# Altium PCB 分电板V2.PcbDoc (part 2 of 2)
Units mil, origin at the board's own origin, x right, y up, seen from the top; angles counter-clockwise.
Board outline 3149.61 x 2362.21 mil, 4 copper layers (Top Layer, GND, POWER, Bottom Layer), stack 23.756 mil thick; 196 components, 158 nets, 590 pads, 320 vias.
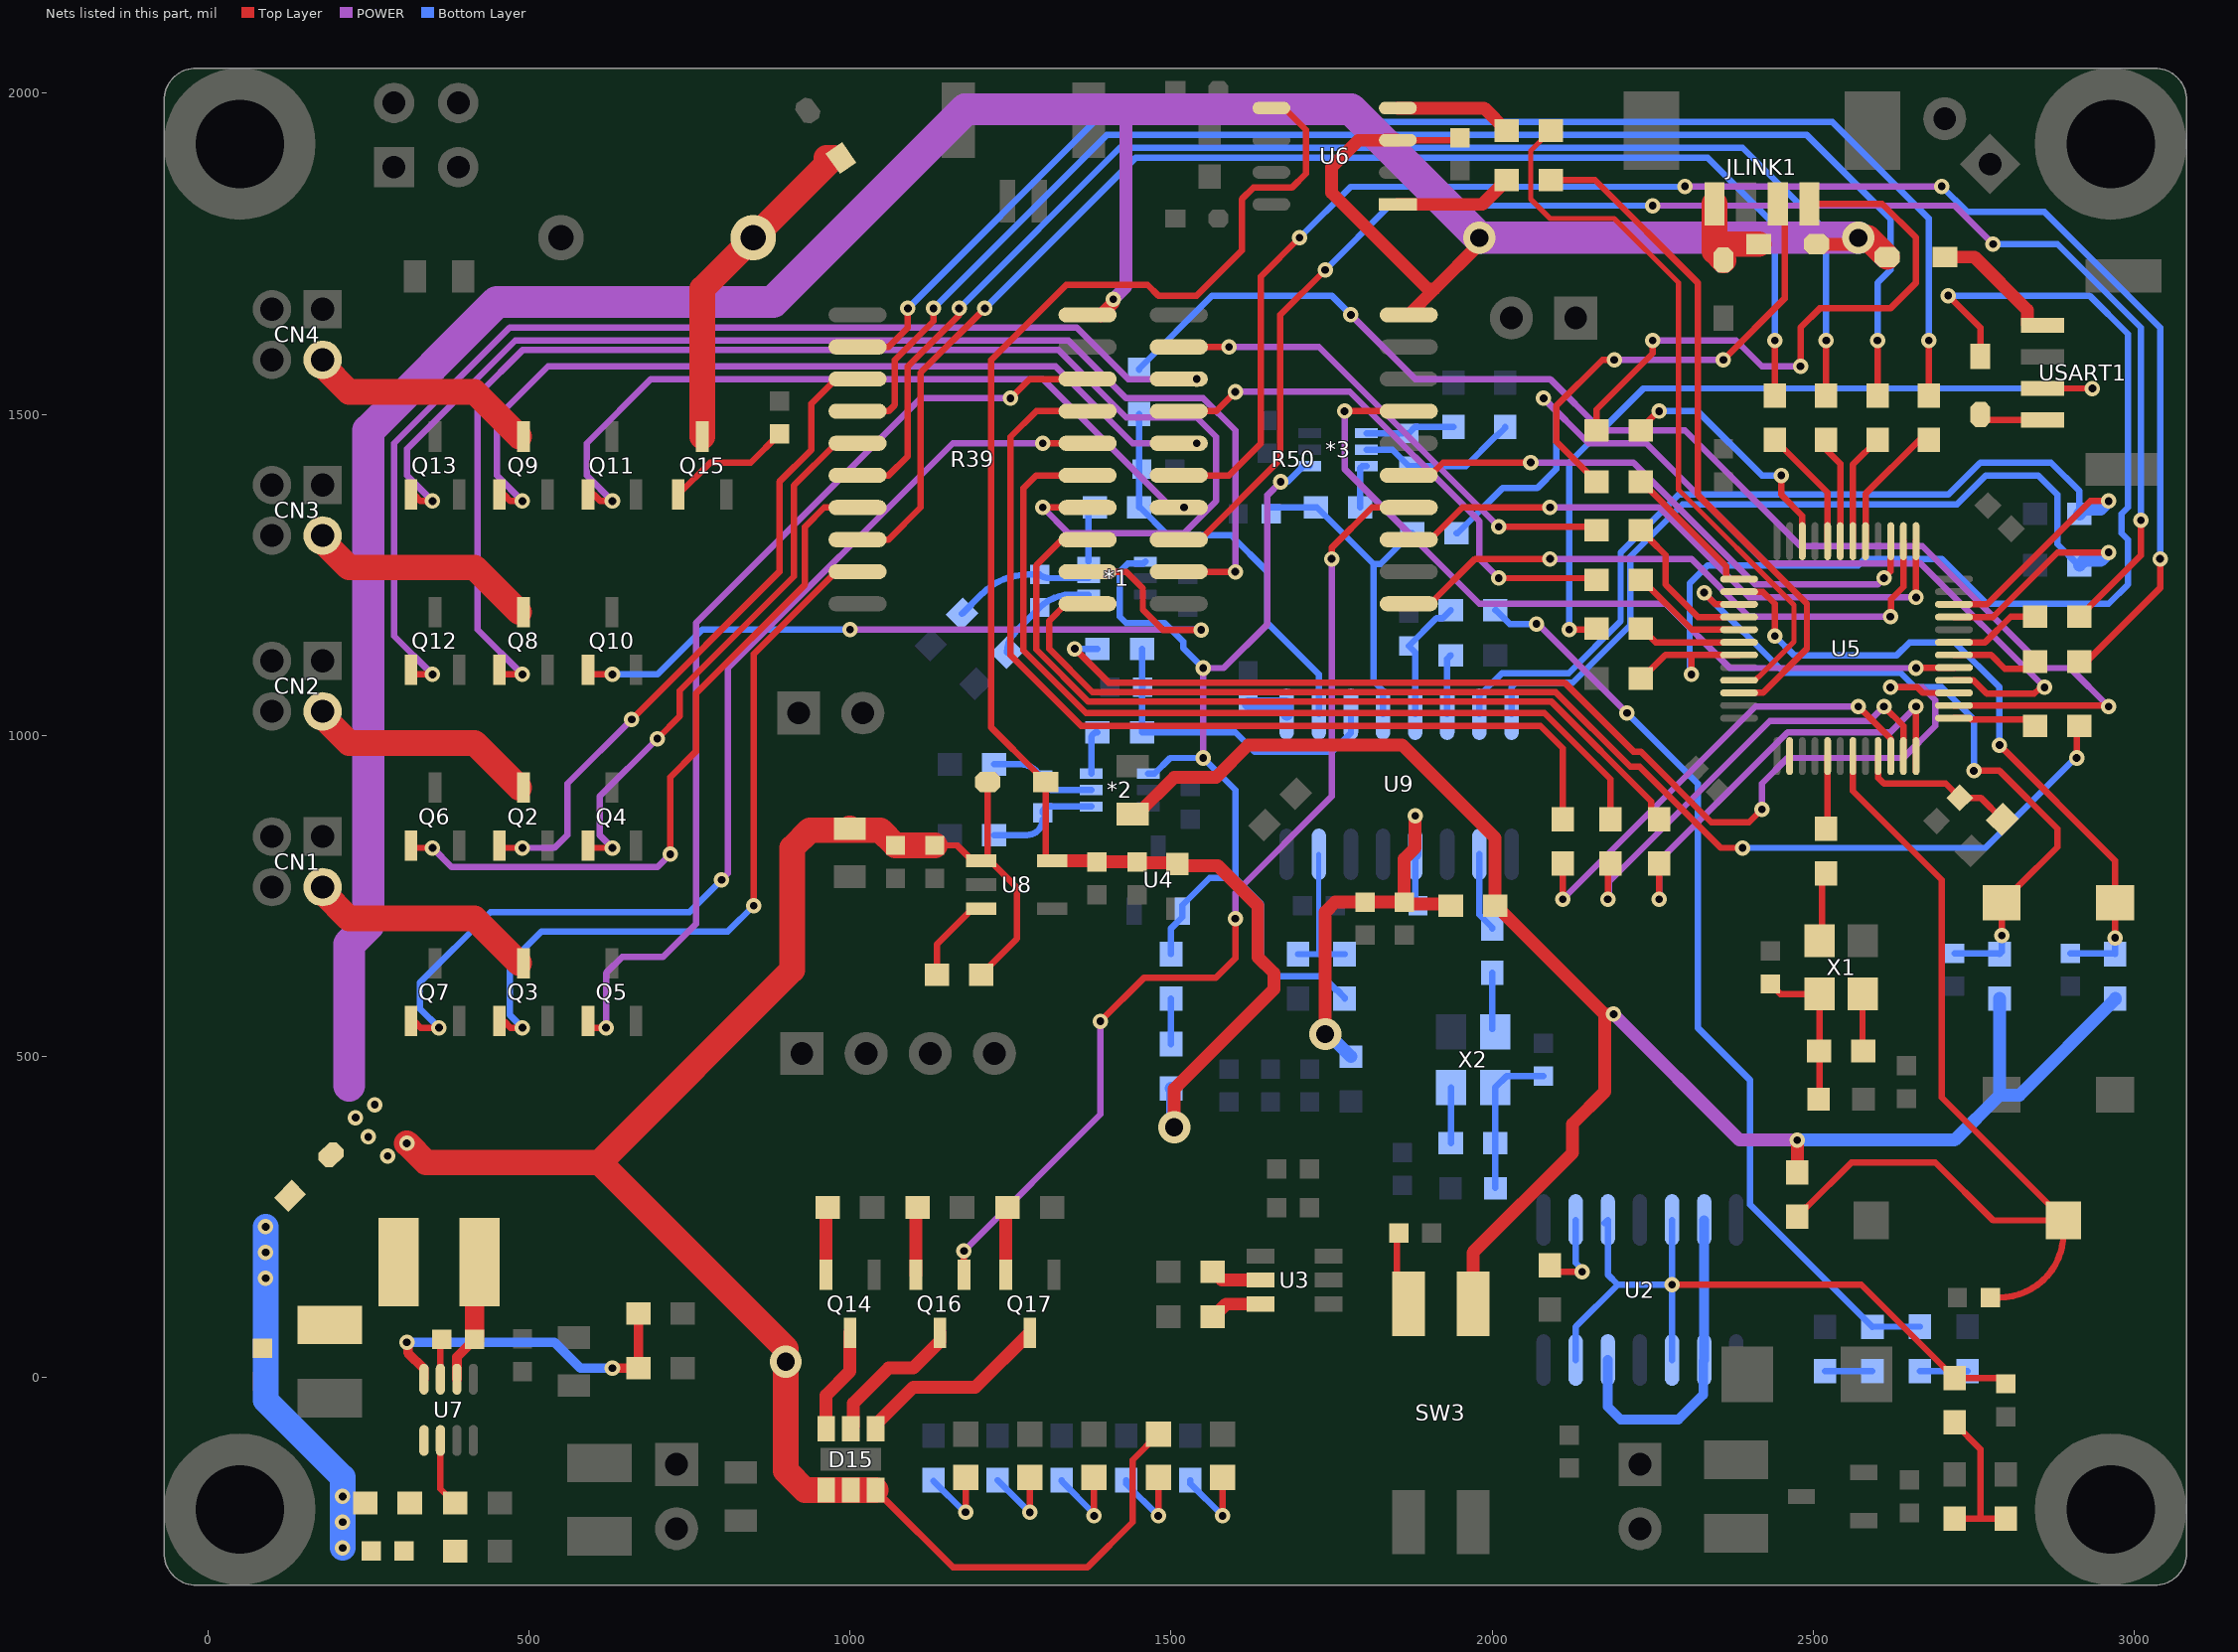
[diagram p4: the nets of this part, all layers, seen from the top]

## Via types
v1: diameter 24, hole 12, Top Layer to Bottom Layer, tented both sides, 277 vias
v2: diameter 34, hole 22, Top Layer to Bottom Layer, tented both sides, 32 vias
v3: diameter 50/50/50 (per signal layer), hole 28, Top Layer to Bottom Layer, tented both sides, 11 vias

## Nets (pads, with @x,y where several pads share a name; then routed paths per layer and width w, separated by ;. In a path a pad name is that pad's centre, name@x,y a point inside that pad or via, vN(x,y) a via of type N, cw(c..) or ccw(c..) an arc to the next point about the centre after c; other vN are vias at no path point) (continued)
MCU3V3: C36.1 C37.1 C38.1 D7.1 L4.2 R9.1 R63.1 R64.2 R65.2 SW3.1 U6.5 U8.5 VDD.1 | length 5214.6
  Top Layer w10: U8.5@1314.71,805.05 1309.44,805.05 1304.6,809.89 D7.1@1304.6,927.65 1300.66,927.65 1289.91,938.4 1289.91,942.33 1220,1012.25 1220,1585 1336.81,1701.81 1463.19,1701.81 1480,1685 1540,1685 1610,1755 1610,1835 1628,1853 1688,1853 1710,1875 1710,1942.74 1675.82,1976.93 U6.5@1656.13,1976.93 ; VDD.1@2004.5,735 VDD.1@2017,722.5
  Top Layer w20: U8.5@1314.71,805.05 1314.87,804.89 1384.59,804.89 1386.24,803.24 1445.24,803.24 1446.89,804.89 1450.16,801.62 1508.38,801.62 L4.2@1510,800 1515,795 1517.5,797.5 1572.5,797.5 1635,735 1635,655 1660,630 1660,605 1505,450 v3(1505,390) ; C38.1@1440,877.6 1447.5,877.6 1504.91,935 1570,935 1620,985 1860,985 2004.5,840.5 VDD.1@2004.5,735 2006,735 2175,566 ; SW3.1@1970,115 1970,195 2125,350 2125,395 2175,445 2175,566 ; v1(2189,566) 2175,566 ; R63.1@2467.5,328.5 R63.1@2475,321 ; R63.1@2475,319.5 R63.1@2475,321 ; v1(2475,370) R63.1@2475,321
  POWER w20: v1(2189,566) 2385,370 v1(2475,370)
  Bottom Layer w20: R9.1@1500,450.5 1502.5,448 1502.5,392.5 v3(1505,390) ; v1(2475,370) 2720,370 2790,440 ; R65.2@2790,590.5 2790,440 ; R64.2@2970,590.5 2970,589 2821,440 2790,440
Net3V3_2: 3V3.2 R33.1 | length 136.2
  Top Layer w10: v1(1580,-215) 3V3.2@1580,-155
  Bottom Layer w10: R33.1@1530,-159.5 1530,-165 v1(1580,-215)
Net5V_2: 5V.2 R55.1 | length 136.1
  Top Layer w10: v1(1480,-215) 5V.2@1480,-155
  Bottom Layer w10: R55.1@1430.25,-159.5 1430.25,-165.25 v1(1480,-215)
Net12V_2: 12V.2 R5.2 | length 136.4
  Top Layer w10: v1(1380,-215) 12V.2@1380,-155.01
  Bottom Layer w10: R5.2@1329.5,-159.5 1329.5,-161 1380,-211.5 v1(1380,-215)
Net24_ON_2: 24.2 R11.2 | length 125.8
  Top Layer w10: v1(1280,-209.75) 24.2@1280,-155
  Bottom Layer w10: R11.2@1229.75,-159.5 v1(1280,-209.75)
Net48V_2: 48V.2 R26.2 | length 124.6
  Top Layer w10: v1(1180,-209.5) 48V.2@1180,-155
  Bottom Layer w10: R26.2@1130,-161 1178.5,-209.5 v1(1180,-209.5)
Net*1_4: *1.4 C14.1 R13.1 | length 170.4
  Bottom Layer w10: R13.1@1244.4,1129.4 cw(c1289.54,1129.4) 1257.6,1161.3 C14.1@1295.71,1199.41 cw(c1344,1151.11) 1344,1219.41 *1.4@1371.42,1219.41
Net*1_5: *1.5 C14.2 R12.1 | length 219.6
  Bottom Layer w10: R12.1@1174.4,1189.4 1206.3,1221.3 cw(c1277.01,1150.59) 1277.01,1250.59 C14.2@1295.71,1250.59 ccw(c1309.19,1264.08) 1309.19,1245 *1.5@1371.42,1245
Net*1_6: *1.6 R76.1 | length 88.5
  Bottom Layer w10: *1.6@1371.42,1270.59 1371.42,1345.21 R76.1@1381.21,1355
Net*2_4: *2.4 C15.1 R73.1 | length 170.8
  Bottom Layer w10: R73.1@1224.5,845 1275.59,845 ccw(c1275.59,869.41) C15.1@1300,869.41 ; C15.1@1300,879.41 cw(c1310,879.41) 1310,889.41 *2.4@1375.71,889.41
Net*2_5: *2.5 C15.2 R14.1 | length 179.7
  Bottom Layer w10: R14.1@1224.5,955 1265.58,955 cw(c1265.58,920.59) C15.2@1300,920.59 ; C15.2@1300,930.59 ccw(c1315.58,930.59) 1315.58,915 *2.5@1375.71,915
Net*2_6: *2.6 R77.1 | length 70
  Bottom Layer w10: *2.6@1375.71,940.59 1375.71,995.21 cw(c1385.5,995.21) R77.1@1385.5,1005
Net*3_4: *3.4 C46.1 R75.1 | length 139.8
  Bottom Layer w10: *3.4@1804.29,1470.59 C46.1@1870,1470.59 1879.91,1480.5 R75.1@1940,1480.5
Net*3_5: *3.5 C46.2 R74.1 | length 252.5
  Bottom Layer w10: *3.5@1804.29,1445 1844.42,1445 C46.2@1870,1419.41 1958.91,1419.41 2006,1466.5 2007.5,1466.5 2020,1479 R74.1@2020,1480.5
Net*3_6: *3.6 R78.1 | length 72.5
  Bottom Layer w10: R78.1@1794.5,1355 1794.5,1416.54 1797.37,1419.41 *3.6@1804.29,1419.41
NetBUZZER1_2: BUZZER1.2 D13.1 Q15.3 | length 530.5
  Top Layer w40: Q15.3@770,1465.38 770,1695.79 844.21,1770 D13.1@973.35,1899.14 ; 963.35,1899.14 D13.1@973.35,1899.14 ; D13.1@975.81,1899.14 D13.1@973.35,1899.14
NetC9_2: C9.2 R15.2 R16.1 U7.1
NetC11_2: C11.2 L1.1 R17.2 X1.4 | length 247.4
  Top Layer w10: C11.2@2433.17,613.16 2448.92,597.41 2509.7,597.41 2509.7,435.28 L1.1@2508.17,433.75
NetC18_1: C18.1 L2.1 U7.6 | length 196.9
  Top Layer w15: U7.6@387.8,-2.3 387.8,32.21 C18.1@415.59,60
  Top Layer w30: C18.1@415.59,60 415.59,172.6 L2.1@422.99,180
NetC18_2: C18.2 U7.7 | length 63.2
  Top Layer w10: U7.7@362.2,-2.3 362.2,57.79 C18.2@364.41,60
NetC25_2: C25.2 L3.1 R27.2 X2.4 | length 239
  Bottom Layer w10: L3.1@2004.45,295.55 X2.4@2004.45,451.69 2022.17,469.41 C25.2@2080,469.41
NetC39_2: C39.2 U9.1 | length 75.7
  Bottom Layer w20: C39.2@1620,1049.41 1678.8,1049.41 1680,1048.21 U9.1@1680,1033.04
NetC50_1: C50.1 R8.1 U9.5 | length 199
  Bottom Layer w10: U9.5@1880,1033.04 1880,1129.4 C50.1@1870,1139.41 1913.09,1182.5 1923,1182.5 R8.1@1935.5,1195
NetD14_2: D14.2 USART1.4 | length 105.8
  Top Layer w10: D14.2@2760,1500 2760,1491.2 USART1.4@2857.01,1491.2
NetD15_2: D15.2 Q17.3 | length 305.3
  Top Layer w20: D15.2@1040,-79.33 1040,-73.43 1098.43,-15 1195,-15 Q17.3@1280,70
NetD15_4: D15.4 Q16.3 | length 229.3
  Top Layer w20: D15.4@1001.42,-79.33 1005.2,-75.55 1005.2,-39.8 1060,15 1098.46,15 1140,56.54 Q16.3@1140,70
NetD15_6: D15.6 Q14.3 | length 164.7
  Top Layer w20: D15.6@962.83,-79.33 962.83,-27.11 1000,10.06 Q14.3@1000,70
NetJLINK1_1: JLINK1.1 R42.2 | length 949.9
  Top Layer w10: R42.2@2162.5,1475 2162.5,1507.5 2250,1595 v1(2250,1615) ; v1(2480,1575) 2480,1635 2510,1665 2620,1665 2660,1705 2660,1775 2607.09,1827.91 JLINK1.1@2493.82,1827.91
  POWER w10: v1(2250,1615) 2380,1615 2420,1575 v1(2480,1575)
NetJLINK1_2: JLINK1.2 R38.2 | length 721.6
  Top Layer w10: R38.2@2162.5,1395 2161,1395 2148.5,1407.5 2148.5,1409 2100,1457.5 2100,1513.18 2171.82,1585 v1(2190,1585) ; v1(2360,1585) 2455.36,1680.36 2455.36,1817.17 JLINK1.2@2444.61,1827.91
  POWER w10: v1(2190,1585) v1(2360,1585)
NetQ14_2: Q14.2 R66.2 | length 106.2
  Top Layer w20: Q14.2@962.6,160 962.76,160.16 962.76,262.26 R66.2@965.5,265
NetQ15_1: Q15.1 R_BEEP.2 | length 196.3
  Top Layer w10: Q15.1@732.6,1375.38 782.22,1425 845.58,1425 R_BEEP.2@890,1469.41
NetQ16_2: Q16.2 R67.2 | length 106.2
  Top Layer w20: Q16.2@1102.6,160 1102.76,160.16 1102.76,262.26 R67.2@1105.5,265
NetQ17_2: Q17.2 R68.2 | length 106.2
  Top Layer w20: Q17.2@1242.6,160 1242.76,160.16 1242.76,262.26 R68.2@1245.5,265
NetR4_2: R4.2 U2.2 | length 138.8
  Top Layer w10: R4.2@2090,175 2100,165 v1(2140,165)
  Bottom Layer w10: U2.2@2130,245.56 2130,178.79 2140,168.79 v1(2140,165)
NetR6_2: R6.2 U3.2 | length 79.9
  Top Layer w20: R6.2@1564.5,165 1566,165 1578.98,152.02 U3.2@1639.04,152.02
NetR7_2: R7.2 U3.3 | length 82.7
  Top Layer w20: R7.2@1564.5,95 1566,95 1585.62,114.62 U3.3@1639.04,114.62
NetR8_2: R8.2 R51.2 R53.2 | length 1460.2
  POWER w10: v1(2068.75,1173.75) 2071.25,1173.75 v1(2210,1035)
  Bottom Layer w10: R8.2@2004.5,1195 2006,1195 2027.25,1173.75 v1(2068.75,1173.75) ; v1(2210,1035) 2320,925 2320,545 2401.8,463.2 2401.8,269.2 R53.2@2592,79 2592.5,79.5 R51.2@2666,79.5
NetR9_2: R9.2 R10.1 | length 71
  Bottom Layer w10: R9.2@1500,519.5 R10.1@1500,590.5
NetR17_1: R17.1 X1.1 | length 89.1
  Top Layer w10: X1.1@2576.63,597.41 2576.63,509.78 R17.1@2577.67,508.75
NetR18_2: R18.2 R19.1 U7.8 | length 530.4
  Top Layer w15: v1(310,55) 311.72,53.28 311.72,38.78 336.6,13.9 U7.8@336.6,-2.3 ; v1(630,15) R19.1@670.5,15 R18.2@670.5,100
  Bottom Layer w15: v1(310,55) 540,55 580,15 v1(630,15)
NetR20_2: R20.2 U6.1 | length 185.3
  Top Layer w20: U6.1@1852.98,1826.93 1984.43,1826.93 R20.2@2022.5,1865
NetR21_1: R21.1 X1.3 | length 96.2
  Top Layer w10: X1.3@2509.7,680.09 2508.67,681.12 2513.67,686.12 R21.1@2513.67,773.75
NetR24_2: R24.2 U6.4 | length 184
  Top Layer w20: U6.4@1852.98,1976.93 1987.46,1976.93 R24.2@2022.5,1941.88
NetR25_1: R25.1 U7.2 | length 107.8
  Top Layer w10: U7.2@362.2,-97.7 362.2,-173.2 384,-195 R25.1@385.5,-195
NetR27_1: R27.1 X2.1 | length 86.6
  Bottom Layer w10: R27.1@1935.55,365.05 X2.1@1935.55,451.69
NetR29_1: R29.1 X2.3 | length 87.7
  Bottom Layer w10: X2.3@2000,542.76 R29.1@2000,630.5
NetR35_2: R35.2 R35B.1 U9.15 | length 229.4
  Bottom Layer w8: U9.15@1730,815 1730,663.38 1733.88,659.5
  Bottom Layer w10: R35B.1@1697.75,659.5 1733.88,659.5 R35.2@1770,659.5
NetR41_2: R41.2 U8.3 | length 139.4
  Top Layer w10: R41.2@1135.1,627.65 1135.1,674.64 1190.7,730.25 U8.3@1204.48,730.25
NetR48_1: R48.1 R51.1 | length 74
  Bottom Layer w10: R51.1@2666,10.5 R48.1@2740,10.5
NetR53_1: R53.1 R56.1 | length 74
  Bottom Layer w10: R56.1@2518,10 R53.1@2592,10
NetR58_2: R58.2 U9.6 | length 94.2
  Bottom Layer w10: U9.6@1930,1033.04 1930,1119.5 R58.2@1935.5,1125
NetR70_1: R70.1 SW3.2 | length 69.7
  Top Layer w10: SW3.2@1851.69,157.99 R70.1@1851.69,227.71
NetR72_1: R72.1 USART1.3 | length 1243.2
  Top Layer w10: v1(2120,1165) 2160.85,1165 R72.1@2162.5,1166.65 ; USART1.3@2857.01,1540.39 v1(2934.6,1540.39)
  Bottom Layer w10: v1(2120,1165) 2120,1425 2235.4,1540.39 v1(2934.6,1540.39)
NetU2_6: U2.6 U2.9 U2.12 | length 517.9
  Bottom Layer w15: U2.12@2180,27.52 2180,-45 2200,-65 2290,-65 2328.55,-26.45 2328.55,26.07 U2.9@2330,27.52 U2.6@2330,245.56
NRST: C44.1 R63.2 RST1.1 U5.7 | length 1546.3
  Top Layer w10: R63.2@2475,250.5 2475,252 2487.5,264.5 2489,264.5 2559.5,335 2690,335 2780,245 RST1.1@2889.6,245 ; U5.7@2561.58,967.91 2561.58,913.42 2700,775 2700,436.57 2889.6,246.97 RST1.1@2889.6,245 ; C44.1@2775.59,125 2789.6,125 ccw(c2789.6,225) 2889.6,225 RST1.1@2889.6,245 ; RST1.1@2895.1,239.5 cw(c2895.1,245) RST1.1@2889.6,245
OSC_8M: R29.2 U9.10 | length 123.8
  Bottom Layer w10: U9.10@1980,815 1980,721 2000,701 R29.2@2000,699.5
OSC_12M: R21.2 U5.5 | length 114.7
  Top Layer w10: R21.2@2520,854.5 ccw(c2520,856.71) 2522.21,856.71 U5.5@2522.21,967.91
PA0: R44.1 U5.10 | length 738.1
  Top Layer w10: v1(2110,745) R44.1@2110,800.5 ; v1(2570,1045) 2570.43,1045 2620.64,994.8 U5.10@2620.64,967.91
  POWER w10: v1(2110,745) 2410,1045 v1(2570,1045)
PA1: R45.1 U5.11 | length 715.7
  Top Layer w10: v1(2180,745) 2180,796.43 R45.1@2184.07,800.5 ; v1(2610,1045) 2640.32,1014.68 U5.11@2640.32,967.91
  POWER w10: v1(2180,745) 2182,747 2182,772 2432.5,1022.5 2587.5,1022.5 v1(2610,1045)
PA2: R47.1 U5.12 | length 716.2
  Top Layer w10: v1(2260,745) R47.1@2260,800.5 ; U5.12@2660.01,943.7 U5.12@2660.01,967.91 v1(2660,1045)
  POWER w10: v1(2260,745) 2260,805 2460,1005 2620,1005 v1(2660,1045)
PA3: R49.1 U5.13 | length 127.3
  Top Layer w10: U5.13@2719.06,1026.96 2743.44,1026.96 2745.4,1025 R49.1@2845.5,1025
PA4: R30.1 U5.14 | length 2064.8
  Top Layer w10: U5.14@2719.06,1046.65 v1@2960,1046.65
  POWER w10: v1(1780,1655) 1880,1555 2090,1555 2170,1475 2300,1475 2480,1295 2670,1295 2860,1105 2900,1105 v1(2960,1045)
  Bottom Layer w10: R30.1@1450,1569.5 1450,1571 1564,1685 1750,1685 v1(1780,1655)
PA5: R32.1 U5.15 | length 1793.8
  Top Layer w10: v1(1350,1135) 1402.5,1082.5 2112.5,1082.5 2220,975 2231.21,975 2341.21,865 2400,865 v1(2420,885) ; v1(2620,1075) 2661.82,1075 2670.49,1066.33 U5.15@2719.06,1066.33
  POWER w10: v1(2420,885) 2420,925 2460,965 2640,965 2690,1015 2690,1055 2670,1075 v1(2620,1075)
  Bottom Layer w10: v1(1350,1135) R32.1@1385.5,1135
PA6: R37.1 U5.16 | length 1440.5
  Top Layer w10: U5.16@2719.06,1086.02 2719.18,1085.9 2749.1,1085.9 2770,1065 2844.02,1065 2851.34,1072.32 2853.53,1072.32 2854.02,1072.81 2854.02,1075 v1(2860,1075) v1@2860,1078.79
  POWER w10: v1(2080,1525) 2150,1455 2240,1455 2427.5,1267.5 2667.5,1267.5 v1(2860,1075)
  Bottom Layer w10: R37.1@1944.5,1315 1946,1315 2016,1385 2070,1385 2100,1415 2100,1505 v1(2080,1525)
PA7: R50.17 U5.17 | length 1267.8
  Top Layer w10: v1(1770,1505) R50.17@1870,1505 ; v1(2660,1105) 2660.58,1105.58 2718.93,1105.58 U5.17@2719.06,1105.7
  POWER w10: v1(1770,1505) 1770,1415 1980,1205 2270,1205 2370,1105 v1(2660,1105)
PA8: R31.1 U5.29 | length 207.3
  Top Layer w10: U5.29@2581.27,1302.55 2581.39,1302.67 2581.39,1376.39 2665.5,1460.5 R31.1@2680,1460.5
PA9: R36.1 U5.30 | length 173.9
  Top Layer w10: U5.30@2561.58,1302.55 2561.58,1422.08 R36.1@2600,1460.5
PA10: R40.1 U5.31 | length 167
  Top Layer w10: R40.1@2520,1460.5 2520,1445 2541.9,1423.1 U5.31@2541.9,1302.55
PA11: R43.1 U5.32 | length 192
  Top Layer w10: R43.1@2440,1460.5 2522.21,1378.29 U5.32@2522.21,1302.55
PA13_SWDIO: R42.1 U5.34 | length 391.4
  Top Layer w10: R42.1@2231.5,1475 2230,1476.5 2258.5,1505 v1(2259.94,1505) ; v1(2450,1405) 2450,1375 2482.84,1342.16 U5.34@2482.84,1302.55
  Bottom Layer w10: v1(2259.94,1505) 2320,1505 2420,1405 v1(2450,1405)
PA14_SWCLK: R38.1 U5.37 | length 228.8
  Top Layer w10: R38.1@2231.5,1396.3 2233,1396.3 2245.5,1383.8 2245.5,1382.42 2364.1,1263.82 2364.1,1243.79 2364.39,1243.5 U5.37@2384.42,1243.5
PA15: C43.1 R64.1 SW1.1 U5.38 | length 1073.6
  Top Layer w10: U5.38@2384.42,1223.81 2384.54,1223.69 2421.31,1223.69 2440,1205 v1(2440,1155) ; v1(2790,985) 2970,805 SW1.1@2970,739.76 v1(2970,685)
  Bottom Layer w10: v1(2440,1155) 2470,1125 2630,1125 2650,1145 2720,1145 2790,1075 v1(2790,985) ; C43.1@2900,660.59 2968.91,660.59 R64.1@2970,659.5 v1(2970,685)
PB0: R57.1 U5.18 | length 135.3
  Top Layer w10: U5.18@2719.06,1125.39 2776.77,1125.39 2798.16,1104 R57.1@2845.5,1104
PB1: R59.1 U5.19 | length 143
  Top Layer w10: U5.19@2719.06,1145.07 2767.5,1145.07 2807.43,1185 R59.1@2845.5,1185
PB3: C42.1 R65.1 SW2.1 U5.39 | length 1116
  Top Layer w10: v1(2330,1222.37) 2348.24,1204.13 U5.39@2384.42,1204.13 ; v1(2750,945) 2790,945 2880,855 2880,826.39 2817.89,764.29 2817.89,762.32 2795.34,739.76 SW2.1@2793.37,739.76 v1(2793.37,688.37)
  Bottom Layer w10: v1(2330,1222.37) 2454.87,1097.5 2635.68,1097.5 2658.18,1075 2700,1075 2750,1025 v1(2750,945) ; C42.1@2720,660.59 R65.1@2791.09,660.59 ; R65.1@2790,659.5 R65.1@2791.09,660.59 ; v1(2793.37,688.37) 2793.37,662.87 R65.1@2791.09,660.59
PB4: R52.1 U5.40 | length 236.6
  Top Layer w10: R52.1@2231.5,1319.42 2233,1319.42 2245.5,1306.92 2245.5,1305.42 2270,1280.92 2270,1235 2320.56,1184.44 U5.40@2384.42,1184.44
PB5: R54.1 U5.41 | length 185.1
  Top Layer w10: R54.1@2231.5,1242.54 2233,1242.54 2310.78,1164.76 U5.41@2384.42,1164.76
PB8_CAN_RX: R24.1 U5.45 | length 1148.6
  Top Layer w8: R24.1@2091.5,1941.88 2090,1941.88 2076.5,1928.38 2076.5,1926.88 2060,1910.38 2060,1835 2090,1805 2190,1805 2290,1705 2290,1383.08 2470,1203.08 2470,1146.12 2414.76,1090.88 2414.2,1090.88 2409.34,1086.02 U5.45@2384.42,1086.02
PB9_CAN_TX: R20.1 U5.46 | length 1069.4
  Top Layer w10: R20.1@2091.5,1865 2160,1865 2320,1705 2320,1375 2490,1205 2490,1135 2421.45,1066.45 2384.54,1066.45 U5.46@2384.42,1066.33 U5.46@2384.29,1066.21
PB12: R50.13 U5.25 | length 956.3
  Top Layer w10: R50.13@1870,1305 1903.46,1305 1953.46,1355 v1(2090,1355) ; v1(2660,1215) U5.25@2660.01,1302.55
  POWER w10: v1(2090,1355) 2260,1355 2400,1215 v1(2660,1215)
PB13: R50.11 U5.26 | length 942.2
  Top Layer w10: R50.11@1870,1205 1903.46,1205 1973.46,1275 v1(2090,1275) ; v1(2620,1185) 2620.97,1185.97 2620.97,1212 2640.32,1231.34 U5.26@2640.32,1302.55
  POWER w10: v1(2090,1275) 2310,1275 2400,1185 v1(2620,1185)
PB14: R50.15 U5.27 | length 893.1
  Top Layer w10: R50.15@1870,1405 1903.46,1405 1923.46,1425 v1(2060,1425) ; v1(2610,1245) 2620.51,1255.51 2620.51,1302.43 U5.27@2620.64,1302.55
  POWER w10: v1(2060,1425) 2220,1425 2410,1235 2600,1235 v1(2610,1245)
PC13: U5.2
R_A: CN2.3 Q2.3 | length 352.3
  Top Layer w40: CN2.3@178.74,1029.59 220,988.33 415.45,988.33 Q2.3@485.07,918.71
R_B: CN1.3 Q3.3 | length 352.3
  Top Layer w40: CN1.3@178.74,756.26 220,715 415.45,715 Q3.3@485.07,645.38
R_C: CN3.3 Q8.3 | length 352.3
  Top Layer w40: CN3.3@178.74,1302.93 220,1261.67 415.45,1261.67 Q8.3@485.07,1192.04
R_D: CN4.3 Q9.3 | length 361
  Top Layer w40: CN4.3@178.74,1585 178.74,1576.26 220,1535 415.45,1535 Q9.3@485.07,1465.38
RED: Q16.1 R50.14 | length 1580.9
  Top Layer w10: Q16.1@1177.4,160 v1(1177.4,197.6) ; v1(1390,555) 1457.5,622.5 1569.32,622.5 1600,653.18 v1(1600,715) ; v1(1750,1275) 1750,1292.24 1812.76,1355 R50.14@1870,1355
  POWER w10: v1(1177.4,197.6) 1390,410.2 v1(1390,555) ; v1(1600,715) 1600,755 1750,905 v1(1750,1275)
SCL: R62.2 U5.21 U9.8 | length 1565.3
  Top Layer w10: U5.21@2719.06,1184.44 2779.44,1184.44 2880,1285 v1(2960,1285)
  Bottom Layer w10: U9.8@2030,1033.04 2030,1075 2037,1082 2125.18,1082 2215,1171.82 2215,1278.79 2296.21,1360 2723.7,1360 2768.7,1405 2850,1405 2880,1375 2880,1298 2913,1265 R62.2@2914.5,1265
  Bottom Layer w20: R62.2@2914.5,1265 2922,1272.5 2947.5,1272.5 v1(2960,1285)
SDA: R61.2 U5.22 U9.7 | length 1591.7
  Top Layer w10: U5.22@2719.06,1204.13 2770.34,1204.13 2931.21,1365 v1(2960,1365)
  Bottom Layer w10: U9.7@1980,1033.04 1980,1061.86 2015.14,1097 2118.97,1097 2200,1178.03 2200,1285 2290,1375 2710,1375 2760,1425 2870,1425 2914.5,1380.5 2914.5,1352.5 R61.2@2914.5,1345
  Bottom Layer w20: R61.2@2914.5,1345 2922,1352.5 2947.5,1352.5 v1(2960,1365)
TIM1_CH1: Q2.1 R39.3 | length 1023.7
  Top Layer w10: Q2.1@461.28,825 v1(490,825) ; v1(660,1025) 890,1255 890,1395 940,1445 940,1516.72 978.28,1555 R39.3@1011.74,1555
  POWER w10: v1(490,825) 540,825 560,845 560,925 v1(660,1025)
TIM1_CH1_IN: R31.2 R39.2 | length 2172.2
  Top Layer w10: R39.2@1011.74,1605 1060,1605 1090,1635 v1(1090,1665) v1@1090,1668.79 ; R31.2@2680,1529.5 v1(2680,1615)
  Bottom Layer w10: v1(1090,1665) 1380,1955 2530,1955 2680,1805 v1(2680,1615)
TIM1_CH2: Q4.1 R39.5 | length 853
  Top Layer w10: Q4.1@601.28,825 v1(630,825) ; v1(700,995) 735,1030 735,1070 912.83,1247.83 912.83,1389.56 978.28,1455 R39.5@1011.74,1455
  POWER w10: v1(630,825) 610,845 610,905 v1(700,995)
TIM1_CH2_IN: R36.2 R39.4 | length 2176.7
  Top Layer w10: R39.4@1011.74,1505 1060,1505 1070,1515 1070,1585 1130,1645 v1(1130,1665) ; R36.2@2600,1529.5 v1(2600,1615)
  Bottom Layer w10: v1(1130,1665) 1400,1935 2490,1935 2620,1805 2620,1725 2600,1705 v1(2600,1615)
TIM1_CH3: Q6.1 R39.7 | length 1110.6
  Top Layer w10: Q6.1@321.28,825 v1(350,825) ; v1(720,815) 720,935 760,975 760,1065 930,1235 930,1325 960,1355 R39.7@1011.74,1355
  POWER w10: v1(350,825) 380,795 700,795 v1(720,815)
TIM1_CH3_IN: R39.6 R40.2 | length 2116.7
  Top Layer w10: R39.6@1011.74,1405 1060,1405 1090,1435 1090,1575 1170,1655 v1(1170,1665) ; R40.2@2520,1529.5 v1(2520,1615)
  Bottom Layer w10: v1(1170,1665) 1420,1915 2390,1915 2520,1785 v1(2520,1615)
TIM1_CH4: Q3.1 R39.9 | length 1165
  Top Layer w10: Q3.1@461.28,555 471.28,545 v1(490,545) ; v1(850,735) 850,1126.72 978.28,1255 R39.9@1011.74,1255
  Bottom Layer w10: v1(490,545) 470,565 470,645 520,695 810,695 v1(850,735)
TIM1_CH4_IN: R39.8 R43.2 | length 2106.2
  Top Layer w10: R39.8@1011.74,1305 1060,1305 1110,1355 1110,1565 v1(1210,1665) ; R43.2@2440,1529.5 v1(2440,1615)
  Bottom Layer w10: v1(1210,1665) 1444.43,1899.43 2335.57,1899.43 2440,1795 v1(2440,1615)
TIM2_CH1: Q5.1 R39.18 | length 1521.4
  Top Layer w10: Q5.1@591.28,545 v1(620,545) ; v1(1250,1525) 1280,1555 R39.18@1370,1555
  POWER w10: v1(620,545) 620,630 645,655 708.7,655 760,706.3 760,1175 1110,1525 v1(1250,1525)
TIM2_CH1_IN: R39.17 R44.2 | length 1507.1
  Top Layer w10: R39.17@1370,1505 1290,1505 1250,1465 1250,1125 1360,1015 2075,1015 2110,980 R44.2@2110,869.5
TIM2_CH2: Q7.1 R39.16 | length 1700.7
  Top Layer w10: Q7.1@321.28,555 331.28,545 v1(360,545) ; v1(1300,1455) R39.16@1370,1455
  POWER w10: v1(800,775) 810,785 810,1105 1160,1455 v1(1300,1455)
  Bottom Layer w10: v1(360,545) 330,575 330,615 440,725 750,725 v1(800,775)
TIM2_CH2_IN: R39.15 R45.2 | length 1420.4
  Top Layer w10: R39.15@1370,1405 1290,1405 1270,1385 1270,1132.57 1367.57,1035 2081.21,1035 2184.07,932.14 R45.2@2184.07,869.5
TIM2_CH3: Q8.1 R39.14 | length 2204.9
  Top Layer w10: Q8.1@461.28,1095 v1(490,1095) ; v1(1300,1355) R39.14@1370,1355
  POWER w10: v1(490,1095) 420,1165 420,1530 490,1600 1325,1600 1430,1495 1540,1495 1570,1465 1570,1365 1520,1315 1340,1315 v1(1300,1355)
TIM2_CH3_IN: R39.13 R47.2 | length 1316.3
  Top Layer w10: R39.13@1370,1305 1330,1305 1290,1265 1290,1133.79 1371.29,1052.5 2092.5,1052.5 2247.5,897.5 2247.5,882 R47.2@2260,869.5
TIM2_CH4: Q10.1 R39.12 | length 1208.7
  Top Layer w10: Q10.1@601.28,1095 v1(630,1095) ; R39.12@1370,1255 1430,1255 1455.96,1229.04 1455.96,1195.76 1487.35,1164.38 v1(1546.84,1164.38)
  POWER w10: v1(1000,1165) 1546.21,1165 v1(1546.84,1164.38)
  Bottom Layer w10: v1(630,1095) 700,1095 770,1165 v1(1000,1165)
TIM2_CH4_IN: R39.11 R49.2 | length 1962.7
  Top Layer w10: R39.11@1370,1205 1336.54,1205 1310,1178.46 1310,1135 1377.5,1067.5 2098.71,1067.5 2214.87,951.34 2229.51,951.34 2355.85,825 v1(2390,825) ; v1(2910,965) 2910,1020.5 R49.2@2914.5,1025
  Bottom Layer w10: v1(2390,825) 2768.18,825 2908.18,965 v1(2910,965)
TIM3_CH1: Q12.1 R50.3 | length 1808.6
  Top Layer w10: Q12.1@316.43,1102.04 316.43,1099.84 321.28,1095 v1(350,1095) ; R50.3@1511.74,1555 v1(1540,1555)
  POWER w10: v1(350,1095) 290,1155 290,1455 470,1635 1353.11,1635 1433.11,1555 v1(1540,1555)
TIM3_CH1_IN: R50.2 R52.2 | length 769.1
  Top Layer w10: R50.2@1511.74,1605 v1(1590,1605) ; v1(2010,1325) 2156.92,1325 R52.2@2162.5,1319.42
  POWER w10: v1(1590,1605) 1730,1605 v1(2010,1325)
TIM3_CH2: Q9.1 R50.5 | length 1380.5
  Top Layer w10: Q9.1@461.28,1375 471.28,1365 v1(490,1365) ; R50.5@1511.74,1455 v1(1540,1455)
  POWER w10: v1(490,1365) 450,1405 450,1495 530,1575 1320,1575 1440,1455 v1(1540,1455)
TIM3_CH2_IN: R50.4 R54.2 | length 819.3
  Top Layer w10: R50.4@1511.74,1505 1570,1505 v1(1600,1535) ; v1(2010,1245) 2160.04,1245 R54.2@2162.5,1242.54
  POWER w10: v1(1600,1535) 1600.59,1535.59 1778.2,1535.59 1980,1333.79 1980,1275 v1(2010,1245)
TIM3_CH3: Q11.1 R50.7 | length 1202
  Top Layer w10: Q11.1@601.28,1375 611.28,1365 v1(630,1365) ; R50.7@1511.74,1355 v1(1520,1355)
  POWER w10: v1(630,1365) 590,1405 590,1455 690,1555 1300,1555 1500,1355 v1(1520,1355)
TIM3_CH3_IN: R50.6 R57.2 | length 2542
  Top Layer w10: R50.6@1511.74,1405 1590,1405 1640,1455 1640,1715 v1(1700,1775) ; R57.2@2914.5,1104 2916,1104 2928.5,1116.5 2928.5,1118 3040,1229.5 v1(3040,1275)
  POWER w10: v1(2300,1855) v1(2700,1855)
  Bottom Layer w10: v1(1700,1775) 1779.43,1854.43 2299.43,1854.43 v1(2300,1855) ; v1(2700,1855) 2740,1815 2860,1815 3040,1635 v1(3040,1275)
TIM4_CH4: Q13.1 R50.9 | length 1856.8
  Top Layer w10: Q13.1@321.28,1375 331.28,1365 v1(350,1365) ; R50.9@1511.74,1255 v1(1600,1255)
  POWER w10: v1(350,1365) 310,1405 310,1446.21 478.79,1615 1340,1615 1430,1525 1550,1525 1600,1475 v1(1600,1255)
TIM4_CH4_IN: R50.8 R59.2 | length 2414.7
  Top Layer w10: R50.8@1511.74,1305 1545.2,1305 1670,1429.8 1670,1655 v1(1740,1725) ; R59.2@2914.5,1185 2916,1185 2928.5,1197.5 2928.5,1199 3010,1280.5 v1(3010,1335)
  POWER w10: v1(2250,1825) 2720,1825 v1(2780,1765)
  Bottom Layer w10: v1(1740,1725) 1840,1825 v1(2250,1825) ; v1(2780,1765) 2880,1765 3010,1635 v1(3010,1335)
UA: C6.1 R30.2 R76.2 U9.2 | length 641.9
  Bottom Layer w10: R30.2@1450,1500.5 1450.21,1500.29 R76.2@1450.21,1355 1451.71,1355 1494.8,1311.91 1593.09,1311.91 1650,1255 1650,1175 1730,1095 U9.2@1730,1033.04
UB: C7.1 R32.2 R77.2 U9.3 | length 510.1
  Bottom Layer w10: R32.2@1454.5,1135 1454.5,1076.09 ccw(c1455.59,1076.09) C7.1@1455.59,1075 ccw(c1455.59,1073.9) 1454.5,1073.9 R77.2@1454.5,1005 1600,1005 1630,975 1750.78,975 1780,1004.22 U9.3@1780,1033.04
UC: C8.1 R37.2 R78.2 U9.4 | length 516.4
  Bottom Layer w10: C8.1@1655.6,1355 R78.2@1725.5,1355 1727,1355 1815,1267 ; U9.4@1830,1033.04 1830,1070 1815,1085 1815,1267 ; R37.2@1875.5,1315 1874,1315 1826,1267 1815,1267
USART1_RX: D14.1 R71.1 U5.43 | length 1899.8
  Top Layer w10: R71.1@2231.5,1088.77 2233,1088.77 2269.62,1125.39 2310,1125.39 ; v1(2310,1095) 2310,1125.39 ; U5.43@2384.42,1125.39 2310,1125.39 ; v1(2710,1685) 2760,1635 D14.1@2760,1590
  Bottom Layer w10: v1(2310,1095) 2307.5,1097.5 2307.5,1236.64 2335.86,1265 2570,1265 2580,1275 2700,1275 2770,1205 2960,1205 2990,1235 2990,1305 2980,1315 2980,1345 2990,1355 2990,1625 2930,1685 v1(2710,1685)
USART1_TX: R72.2 U5.42 | length 161.9
  Top Layer w10: R72.2@2231.5,1166.65 2233,1166.65 2254.58,1145.07 U5.42@2384.42,1145.07
VCC5V: 5V.1 C17.2 C28.1 C34.1 C35.1 D7.2 D10.2 D12.2 D15.1 D15.3 D15.5 D16.2 R39.20 R41.1 R50.20 U6.3 U8.1 | length 7794.9
  Top Layer w10: D15.1@1040,-175 1040,-180.91 1048.78,-189.69 1054.68,-189.69 1160,-295 1370,-295 1440,-225 1440,-128.07 5V.1@1480,-88.07 ; C28.1@1132.01,828.9 1166.85,828.9 1190.7,805.05 U8.1@1204.48,805.05 U8.1@1209.75,805.05 ; R41.1@1204.1,627.65 1205.6,627.65 1218.1,640.15 1218.1,641.65 1260,683.55 1260,763.31 1218.26,805.05 U8.1@1209.75,805.05 ; D7.2@1214.6,927.65 1214.6,809.89 U8.1@1209.75,805.05 ; U6.3@1852.98,1926.93 1946.34,1926.93 C17.2@1950,1930.59
  Top Layer w20: R39.20@1370,1655 1370.69,1655.69 1390,1655.69 1390,1653.61 1410,1673.61 v1(1410,1679.31) ; U6.3@1833.61,1926.93 U6.3@1852.98,1926.93 1852.82,1926.77 1791.77,1926.77 1750,1885 1750,1845 1900,1695 1910,1695 ; R50.20@1870,1655 1910,1695 ; v3(1980,1775) 1980,1765 1910,1695 ; D12.2@2505,1765 2575,1765 v3@2585,1775
  Top Layer w40: v1(310,365) 340,335 610,335 ; D15.1@1040,-175 D15.3@1001.42,-175 D15.5@962.83,-175 930,-175 900,-145 v3(900,25) 900,45 610,335 ; C28.1@1132.01,828.9 C34.1@1070.82,828.9 1047.17,852.55 1002.09,852.55 C35.1@999.59,855.05 997.09,852.55 937.55,852.55 910,825 910,635 610,335 ; v3@2585,1775 D16.2@2615,1745
  POWER w20: v1(1410,1679.31) 1430,1699.31 1430,1975
  POWER w50: 220,455 220,675 250,705 250,1475 450,1675 880,1675 1180,1975 1430,1975 1780,1975 v3(1980,1775) v3(2570,1775)
  other v1: 280,345 250,375 230,405 260,425
VCC_DCDC: C9.1 C13.1 C16.1 D10.1 L2.2 R16.2 | length 549.7
  Bottom Layer w40: v1(90,235) v1(90,195) v1(90,155) 90,-35 210,-155 v1(210,-185) v1(210,-225) v1(210,-265)
VCC_STLINK: D9.2 D12.1 JLINK1.4 | length 167.1
  Top Layer w40: JLINK1.4@2346.18,1827.91 2346.18,1753.82 ; D9.2@2360,1740 2346.18,1753.82 ; D12.1@2415,1765 2357.36,1765 2346.18,1753.82
VCC_USART: D16.1 USART1.1 | length 208.7
  Top Layer w20: D16.1@2705,1745 2750.81,1745 2833.51,1662.3 2833.51,1640.59 2835.31,1638.8 USART1.1@2857.01,1638.8
VDD: C29.1 C30.1 C41.1 L5.1 U9.12 VDD.2 | length 732.1
  Top Layer w20: v3(1740,535) 1740,725 1755.59,740.59 C30.1@1801.77,740.59 C29.1@1862.95,740.59 ; v1(1880,875) 1880,825 1862.95,807.95 C29.1@1862.95,740.59 ; VDD.2@1935.5,735 1932.7,737.8 1865.74,737.8 C29.1@1862.95,740.59
  Bottom Layer w10: U9.12@1880,815 1880,739.41 C41.1@1884.41,735
  Bottom Layer w20: v3(1740,535) 1745,535 L5.1@1780,500 ; U9.12@1880,815 v1(1880,875)
VDDA: C19.1 R22.2 U5.9 | length 254.1
  Top Layer w10: U5.9@2600.95,967.91 2601.07,967.79 2601.07,933.93 2610,925 2706.19,925 C19.1@2728.1,903.1 2760.69,903.1 R22.2@2794.4,869.4
VH: C1.2 R3.2 U2.3 U2.5 U2.10 U2.13 | length 1145.8
  Top Layer w10: v1(2280,145) 2574.5,145 2706,13.5 2707.5,13.5 2720,1 R3.2@2720,-0.5 2791.09,-0.5 C1.2@2800,-9.41
  Bottom Layer w10: U2.13@2130,27.52 2130,79.39 2195.61,145 ; U2.3@2175.18,240.74 U2.3@2180,245.56 2180,160.61 2195.61,145 ; U2.10@2280,27.52 v1(2280,145) ; U2.5@2280,245.56 v1(2280,145) ; 2195.61,145 v1(2280,145)
VH_IN: R1.2 R2.1 R3.1 | length 246.6
  Top Layer w10: R1.2@2720,-219.5 2760,-219.5 ; R3.1@2720,-69.5 2720,-71 2760,-111 2760,-219.5 ; R2.1@2800,-219.5 2760,-219.5
VREF: *1.1 *2.1 *3.1 R10.2 R35.1 U4.1 | length 1629.3
  POWER w10: v1(1550,965) v1(1550,1105) 1581.82,1105 1650,1173.18 1650,1374.27 v1(1670.73,1395)
  Bottom Layer w10: *1.1@1460,1270.59 1457.13,1267.72 1432.72,1267.72 1420,1255 1420,1185 1430,1175 1490,1175 1518.66,1146.34 1518.66,1136.34 v1(1550,1105) ; *2.1@1464.29,940.59 1474.13,940.59 1498.54,965 v1(1550,965) 1600,915 1600,778.23 ; R10.2@1500,659.5 1500,699.73 1517.4,717.13 U4.1@1517.4,726.38 1517.4,735.63 1560,778.23 1600,778.23 ; v1(1670.73,1395) 1681.46,1395 1705.87,1419.41 *3.1@1715.71,1419.41 ; R35.1@1770,590.5 1770,592 1757.5,604.5 1756,604.5 1735.5,625 1660,625 1640,645 1640,738.23 1600,778.23
pads on no net: *.12 D15.7 P1.1 P2.1 P3.1 P4.1 U2.7 U2.8 U2.14 U4.3 U5.1 U5.3 U5.4 U5.6 U5.28 U5.33 U8.4 U9.9
copper on no net:
  other v1: 970,-127.16 1001.42,-127.16 1030,-127.16
  other v2: 49.69,-298.5 2963.08,-298.5 -16.41,-271.09 115.8,-271.09 2896.98,-271.09 3029.18,-271.09 -43.81,-204.99 143.2,-204.99 2869.57,-204.99 3056.58,-204.99 -16.41,-138.89 115.8,-138.89 2896.98,-138.89 3029.18,-138.89 49.69,-111.49 2963.08,-111.49 49.69,1827.49 2963.08,1827.49 -16.41,1854.89 115.8,1854.89 2896.98,1854.89 3029.18,1854.89 -43.81,1920.99 143.2,1920.99 2869.57,1920.99 3056.58,1920.99 -16.41,1987.09 115.8,1987.09 2896.98,1987.09 3029.18,1987.09 49.69,2014.5 2963.08,2014.5

## Polygon pours and split planes (outlines as drawn)
no net on Top Layer "TOP-GND" (solid, remove dead copper, pour order 75): -68.11,-273.11 -68.11,1989.09 cw(c-18.11,1989.09) -18.11,2039.09 3031.5,2039.09 cw(c3031.5,1989.09) 3081.5,1989.09 3081.5,-273.11 cw(c3031.5,-273.11) 3031.5,-323.11 -18.11,-323.11 cw(c-18.11,-273.11)
GND on Top Layer "Top Layer-No Net2" (solid, pour order 74): -68.11,-273.11 -68.11,1989.09 cw(c-18.11,1989.09) -18.11,2039.09 3031.5,2039.09 cw(c3031.5,1989.09) 3081.5,1989.09 3081.5,-273.11 cw(c3031.5,-273.11) 3031.5,-323.11 -18.11,-323.11 cw(c-18.11,-273.11)
VCC_DCDC on Top Layer "Top Layer-VCC_DCDC" (solid, pour order 17): 330,115 270,55 70,55 70,285 330,285
GND on Top Layer "Top Layer-GND" (solid, pour order 8): 509,-217 383,-217 284,-217 284,-119 227,-62 227,-20 -11,-20 -11,59 92,59 100,24 284,24 284,21 462,-157 509,-157
GND on Top Layer "Bottom Layer-No Net 1" (solid, pour order 63): 930,-45 930,-205 1070,-205 1070,-45
GND on Top Layer "Top Layer-GND 4" (solid, pour order 69): 960,795 1150,795 1170,775 1220,775 1220,755 1165.98,755 1120,705 960,705
MCU3V3 on Top Layer "Top Layer-MCU3V3" (solid, pour order 71): 1370,785 1370,855 1410,895 1470,895 1530,835 1530,785
GND on Top Layer "Top Layer-GND 3" (solid, pour order 65): 2180,-195 2180,-285 2500,-285 2550,-235 2660,-235 2670,-225 2670,-195 2610,-195 2600,-205 2550,-205 2540,-215 2310,-215 2290,-195
GND on Top Layer "TOP_L_MOS_GND" (solid, pour order 49): 657.77,1375 627.77,1400 627.77,1420 652.77,1420 654.77,1450 682.77,1450 682.77,1375
VCC5V on Top Layer "Top Layer-VCC5V" (solid, pour order 59): 170,345 191.82,406.82 240,455 320,455 350,425 350,335 320,305 210,305 180,335
GND on Top Layer "Top Layer-GND 1" (solid, pour order 55): 230,1745 230,1685 340,1685 340,1745
GND on Top Layer "Top Layer-GND 2" (solid, pour order 53): 780,1405 780,1315 870,1315 870,1405
no net on Top Layer "Top Layer-No Net 1" (solid, pour order 51): 710,1405
GND on Top Layer "TOP_L_MOS_GND" (solid, pour order 47): 657.77,1101.67 627.77,1126.67 627.77,1146.67 652.77,1146.67 654.77,1176.67 682.77,1176.67 682.77,1101.67
GND on Top Layer "TOP_L_MOS_GND" (solid, pour order 45): 657.77,828.33 627.77,853.33 627.77,873.33 652.77,873.33 654.77,903.33 682.77,903.33 682.77,828.33
GND on Top Layer "TOP_L_MOS_GND" (solid, pour order 43): 657.77,555 627.77,580 627.77,600 652.77,600 654.77,630 682.77,630 682.77,555
GND on Top Layer "TOP_L_MOS_GND" (solid, pour order 41): 382.23,555 352.23,580 352.23,600 377.23,600 379.23,630 407.23,630 407.23,555
GND on Top Layer "TOP_L_MOS_GND" (solid, pour order 0): 382.23,828.33 352.23,853.33 352.23,873.33 377.23,873.33 379.23,903.33 407.23,903.33 407.23,828.33
GND on Top Layer "TOP_L_MOS_GND" (solid, pour order 39): 382.23,1101.67 352.23,1126.67 352.23,1146.67 377.23,1146.67 379.23,1176.67 407.23,1176.67 407.23,1101.67
GND on Top Layer "TOP_L_MOS_GND" (solid, pour order 37): 382.23,1375 352.23,1400 352.23,1420 377.23,1420 379.23,1450 407.23,1450 407.23,1375
GND on Top Layer "TOP_L_MOS_GND" (solid, pour order 35): 520,555 490,580 490,600 515,600 517,630 545,630 545,555
GND on Top Layer "TOP_L_MOS_GND" (solid, pour order 33): 520,828.33 490,853.33 490,873.33 515,873.33 517,903.33 545,903.33 545,828.33
GND on Top Layer "TOP_L_MOS_GND" (solid, pour order 31): 520,1101.67 490,1126.67 490,1146.67 515,1146.67 517,1176.67 545,1176.67 545,1101.67
no net on Top Layer "Top Layer-No Net 2" (solid, pour order 29): 520,555 490,580 490,600 515,600 517,630 545,630 545,555
no net on Top Layer "Top Layer-No Net 3" (solid, pour order 27): 520,828.33 490,853.33 490,873.33 515,873.33 517,903.33 545,903.33 545,828.33
no net on Top Layer "Top Layer-No Net 4" (solid, pour order 25): 520,1101.67 490,1126.67 490,1146.67 515,1146.67 517,1176.67 545,1176.67 545,1101.67
no net on Top Layer "Top Layer-No Net 5" (solid, pour order 23): 360,1445 165,1445
no net on Top Layer "Top Layer-No Net 6" (solid, pour order 21): 270,1445
GND on Top Layer "TOP_L_MOS_GND" (solid, pour order 19): 520,1375 490,1400 490,1420 515,1420 517,1450 545,1450 545,1375
VCC_DCDC on Top Layer "Top Layer-VCC_DCDC 1" (solid, pour order 14): 190,-165 190,-295 270,-295 270,-165
NetC9_2 on Top Layer "Top Layer-NetC9_2" (solid, pour order 2): 405,-288 290,-288 290,-183 330,-143 330,-75 344,-75 345,-76 345,-232 366,-253 405,-253
no net on Top Layer "Top Layer-No Net" (solid, pour order 10): 296,-177
24V_IN on Top Layer "Top Layer-24V_IN" (solid, pour order 6): 406,21 406,-24 410,-28 461,-28 559,-126 559,-162 659,-162 659,-103 535,21
GND on Bottom Layer "Top Layer-No Net1" (solid, pour order 73): -68.11,-273.11 -68.11,1989.09 cw(c-18.11,1989.09) -18.11,2039.09 3031.5,2039.09 cw(c3031.5,1989.09) 3081.5,1989.09 3081.5,-273.11 cw(c3031.5,-273.11) 3031.5,-323.11 -18.11,-323.11 cw(c-18.11,-273.11)
GND on Bottom Layer "Bottom Layer-No Net" (solid, pour order 12): 240,55
VCC5V on POWER "POWER-VCC5V" (solid, pour order 61): 190,405 290,305 320,305 370,355 370,435 320,485 190,485
GND on GND (split plane): 271 vertices, not listed, extent -48.06,-303.06 3061.45,2019.05
GND on GND (split plane): 2014.57,579.68 2019.05,578.78 2023.38,577.31 2027.49,575.29 2031.29,572.75 2034.73,569.73 2037.75,566.29 2040.29,562.49 2042.31,558.38 2043.78,554.05 2044.68,549.57 2044.96,545.28 2044.9,545 2044.9,435 2044.96,434.73 2044.67,431.09 2043.75,427.28 2042.25,423.66 2040.21,420.32 2037.66,417.34 2034.68,414.79 2031.34,412.75 2027.72,411.25 2023.91,410.33 2020.27,410.04 2020,410.1 1920,410.1 1919.73,410.04 1916.09,410.33 1912.28,411.25 1908.66,412.75 1905.32,414.79 1902.34,417.34 1899.79,420.32 1897.75,423.66 1896.25,427.28 1895.33,431.09 1895.04,434.73 1895.1,435 1895.1,555 1895.04,555.27 1895.33,558.91 1896.25,562.72 1897.75,566.34 1899.79,569.68 1902.34,572.66 1905.32,575.21 1908.66,577.25 1912.28,578.75 1916.09,579.67 1919.73,579.96 1920,579.9 2010,579.9 2010.28,579.96
GND on GND (split plane): 2495,704.9 2604.9,704.9 2604.9,595 2604.96,594.73 2604.67,591.09 2603.75,587.28 2602.25,583.66 2600.21,580.32 2597.66,577.34 2594.68,574.79 2591.34,572.75 2587.72,571.25 2583.91,570.33 2580.27,570.04 2580,570.1 2500,570.1 2499.68,570.03 2496.1,570.39 2492.35,571.53 2488.89,573.37 2485.86,575.86 2483.37,578.89 2481.53,582.35 2480.39,586.1 2480.03,589.68 2480.1,590 2480.1,690 2480.05,690.24 2480.32,692.92 2481.17,695.73 2482.55,698.32 2484.41,700.59 2486.68,702.45 2489.27,703.83 2492.08,704.68 2494.76,704.95

## Other copper
Top Layer:
  pour cut-out: 2515,720 2510,725 2420,725 2395,700 2395,570 2415,550 2615,550 2640,575 2640,700 2610,730 2575,730
  pour cut-out: 962.55,1670.72 962.55,1189.28 1560.93,1189.28 1553.71,1196.49 1553.71,1675.55
  pour cut-out: 962.55,1670.72
  pour cut-out: 2638.17,653.75
Bottom Layer:
  pour cut-out: 1881.63,586.63 1850,555 1850,450 1895,405 2090,405 2120,435 2120,565 2095,590 2091.63,586.63
GND (plane layer: these items are gaps in the copper):
  lines w10: 2609.43,708.3 ccw(c2607.73,708.3) 2607.73,710 2495,710 ccw(c2495,690) 2475,690 2475,590 ccw(c2500,590) 2500,565 2580,565 ccw(c2580,595) 2610,595 2610,708.3 ; 2830,1145 2830,905 cw(c2780,905) 2780,855 2300,855 cw(c2300,905) 2250,905 2250,1385 cw(c2300,1385) 2300,1435 2780,1435 cw(c2780,1385) 2830,1385 2830,1215 ; 1890,435 ccw(c1920,435) 1920,405 2020,405 ccw(c2020,435) 2050,435 2050,545 ccw(c2010,545) 2010,585 1980,585 1920,585 ccw(c1920,555) 1890,555 1890,435
  lines w20: 820,-145 ccw(c820,-100) 865,-100 865,545 cw(c885,545) 885,565 ccw(c885,600) 920,600 920,745 ccw(c895,745) 895,770 cw(c895,820) 845,820 845,1050 cw(c895,1050) 895,1100 915,1100 ccw(c915,1150) 965,1150 965,2015

## Silkscreen, mask and mechanical layers (free items; w line width, h text height)
Top Overlay:
  text "无人机分电板V2" at 215.91,430.91 h100
  text "2023" at 397,341 h100
Mechanical 1:
  circle w50: c50,1920.98 r51.18
  circle w50: c2963.39,1920.98 r51.18
  circle w50: c2963.39,-205 r51.18
  circle w50: c50,-205 r51.18
  lines w10: -68.11,-273.11 ccw(c-18.11,-273.11) -18.11,-323.11 3031.5,-323.11 ccw(c3031.5,-273.11) 3081.5,-273.11 3081.5,1989.09 ccw(c3031.5,1989.09) 3031.5,2039.09 -18.11,2039.09 ccw(c-18.11,1989.09) -68.11,1989.09 -68.11,-273.11

## Text inside footprints (layer, text, board x,y; h text height)
BUZZER1: Top Overlay "+" at 524.61,1851.51 h32.69
SW3: Top Overlay "ON" at 2050.64,-168.3 h15.33 r180; Top Overlay "1" at 1981.46,48.31 h15.44; Top Overlay "2" at 1881.46,48.31 h15.44